# EAGLE board Ex FTDI Cable (EAGLE 7.2.0)
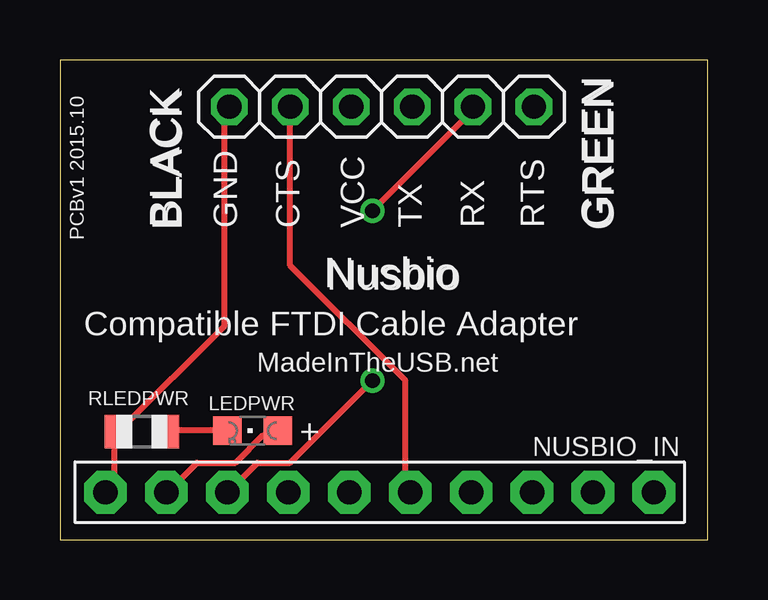
[diagram p0: board, top side]
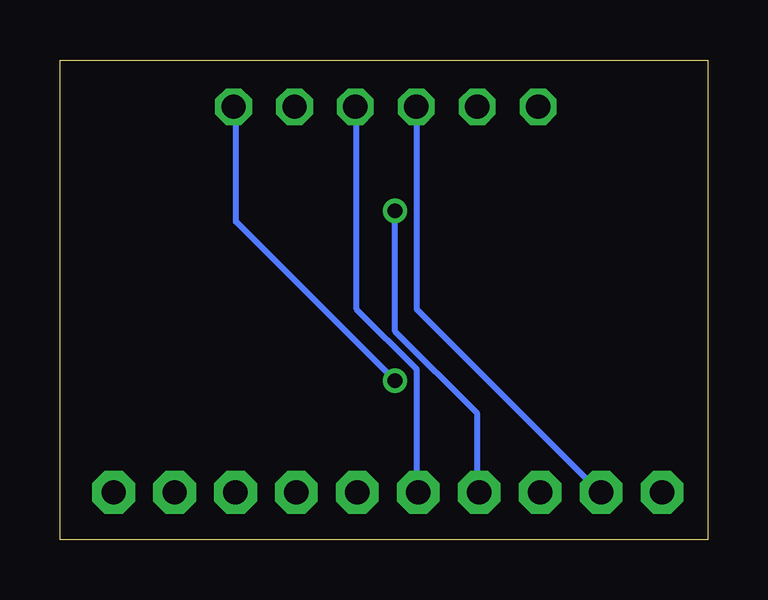
[diagram p1: board, bottom side, seen from below]

Size 27 x 20 mm. Coordinates in mm from the lower left corner, seen from the top.
Outline: 0,0 27,0 27,20 0,20 0,0
Copper layers (1*16): Top 0.035mm / dielectric 1.5mm / Bottom 0.035mm
Design rules "default": minimum track width 10mil, minimum drill 24mil, track to track 8mil, track to pad 8mil, pad to pad 8mil, via to via 8mil, smd to smd 8mil, copper to edge 40mil, drill to drill 8mil, minimum pad ring 10mil, minimum via ring 8mil, stop-mask expansion 4mil, vias tented up to drill 0mil, thermal gap 10mil

## Footprints (pad centres in the part's own frame; a part is rotated, then mirrored left to right if it is on the bottom)
CHIPLED_0805 = smd 1.2 x 1.2: A 0,-1.05; C 0,1.05
1X10-BIG = drill 1.016 pad 1.778 octagon: 1 -11.43,0; 2 -8.89,0; 3 -6.35,0; 4 -3.81,0; 5 -1.27,0; 6 1.27,0; 7 3.81,0; 8 6.35,0; 9 8.89,0; 10 11.43,0
1X06 = drill 1.016 octagon: 1 -6.35,0; 2 -3.81,0; 3 -1.27,0; 4 1.27,0; 5 3.81,0; 6 6.35,0
R0805 = smd 1.1 x 1.4: 1 -1,0; 2 1,0

## Placement (x,y rotation side)
LEDPWR  [CHIPLED_0805]  8.03,4.54 90 top
NUSBIO_IN  PINHD-1X10  [1X10-BIG]  13.33,1.97 180 top
OUT  [1X06]  13.41,18.05 0 top
RLEDPWR  [R0805]  3.41,4.5 180 top

## Library data of the parts
LEDPWR NUSBIO_IN OUT RLEDPWR = adafruit

## Nets
GND: NUSBIO_IN.10 OUT.1 RLEDPWR.2
N$1: NUSBIO_IN.5 OUT.2
N$2: NUSBIO_IN.6 OUT.4
N$3: NUSBIO_IN.7 OUT.5
N$4: NUSBIO_IN.8 OUT.6
N$11: LEDPWR.C RLEDPWR.1
N$14: LEDPWR.A NUSBIO_IN.9 OUT.3

## Tracks (layer width: path | path; a pad name or v marks a point on that pad's centre or on a via)
GND
  Top 0.254: NUSBIO_IN.10 2.06,2.06 2.29,2.29 2.29,4.34 RLEDPWR.2 2.52,4.57 6.86,8.91 6.86,17.83 OUT.1
N$1
  Top 0.254: OUT.2 9.6,17.83 9.6,11.43 14.4,6.63 14.4,2.06 NUSBIO_IN.5
N$2
  Bottom 0.254: OUT.4 14.63,17.83 14.63,9.6 12.12,7.09 12.12,2.06 NUSBIO_IN.6
N$3  (via drill 0.61)
  Top 0.254: v13.03,13.72 17.14,17.83 OUT.5
  Bottom 0.254: v13.03,13.72 13.03,8.69 9.6,5.26 9.6,2.06 NUSBIO_IN.7
N$4  (via drill 0.61)
  Top 0.254: v13.03,6.63 9.6,3.2 8.23,3.2 7.09,2.06 NUSBIO_IN.8
  Bottom 0.254: v13.03,6.63 19.66,13.26 19.66,17.83 OUT.6
N$11
  Top 0.254: LEDPWR.C 6.86,4.57 4.57,4.57 RLEDPWR.1
N$14
  Top 0.254: LEDPWR.A 8.91,4.34 8.46,4.34 7.32,3.2 5.71,3.2 4.57,2.06 NUSBIO_IN.9
  Bottom 0.254: OUT.3 12.12,17.83 12.12,9.6 4.57,2.06 NUSBIO_IN.9

## Text on the board
tNames: BLACK | BLACK | GND | CTS | VCC | TX | RX | RTS | GREEN | GREEN | PCBv1 2015.10 | Nusbio | Nusbio | Compatible FTDI Cable Adapter | MadeInTheUSB.net | +